# Altium PCB pneu-master.PcbDoc
Units mil, origin at the board's own origin, x right, y up, seen from the top; angles counter-clockwise.
Board outline 2400 x 2000 mil, 2 copper layers (Top, Bottom); 67 components, 57 nets, 233 pads, 159 vias.
Unrouted connection lines stored in the file: 18.
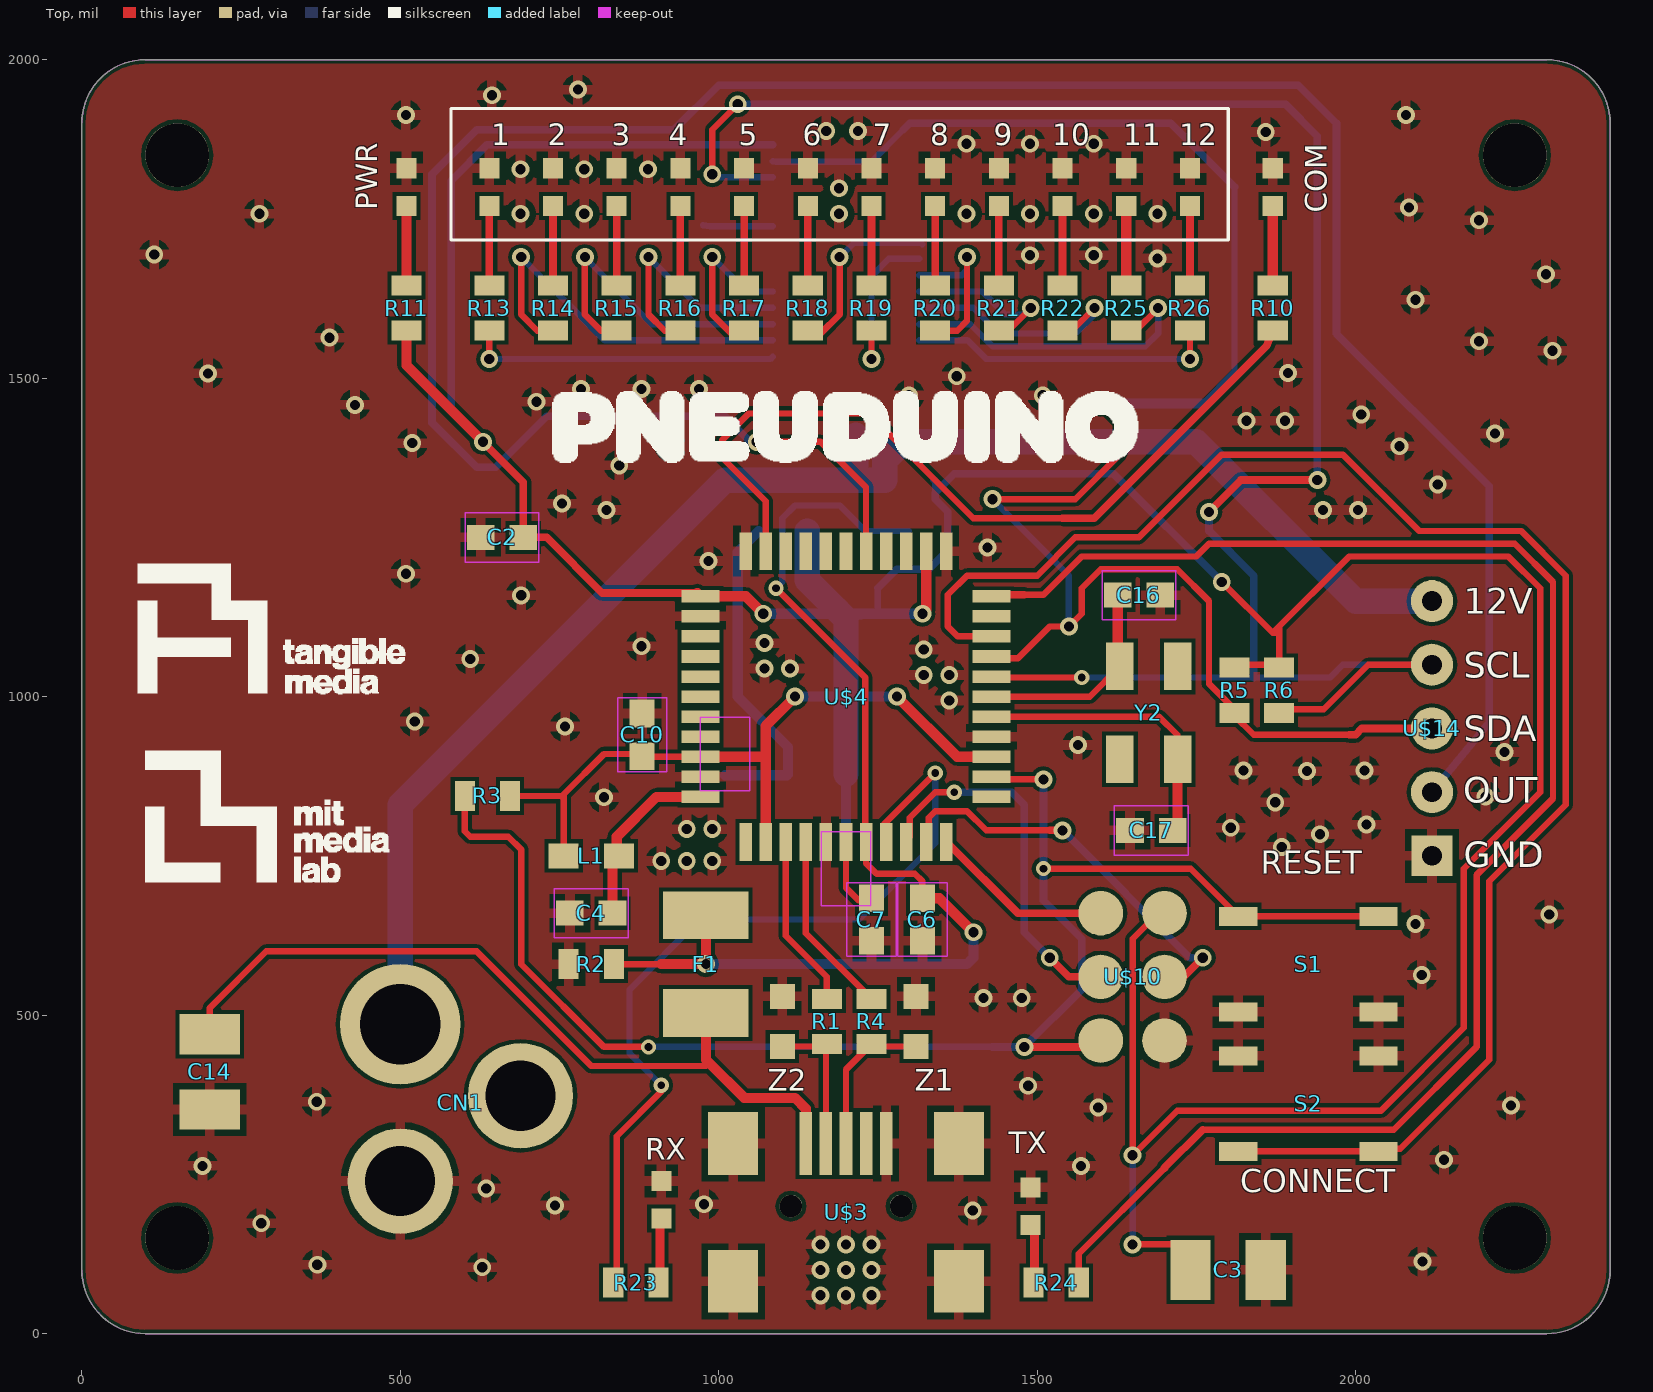
[diagram p0: Top view]
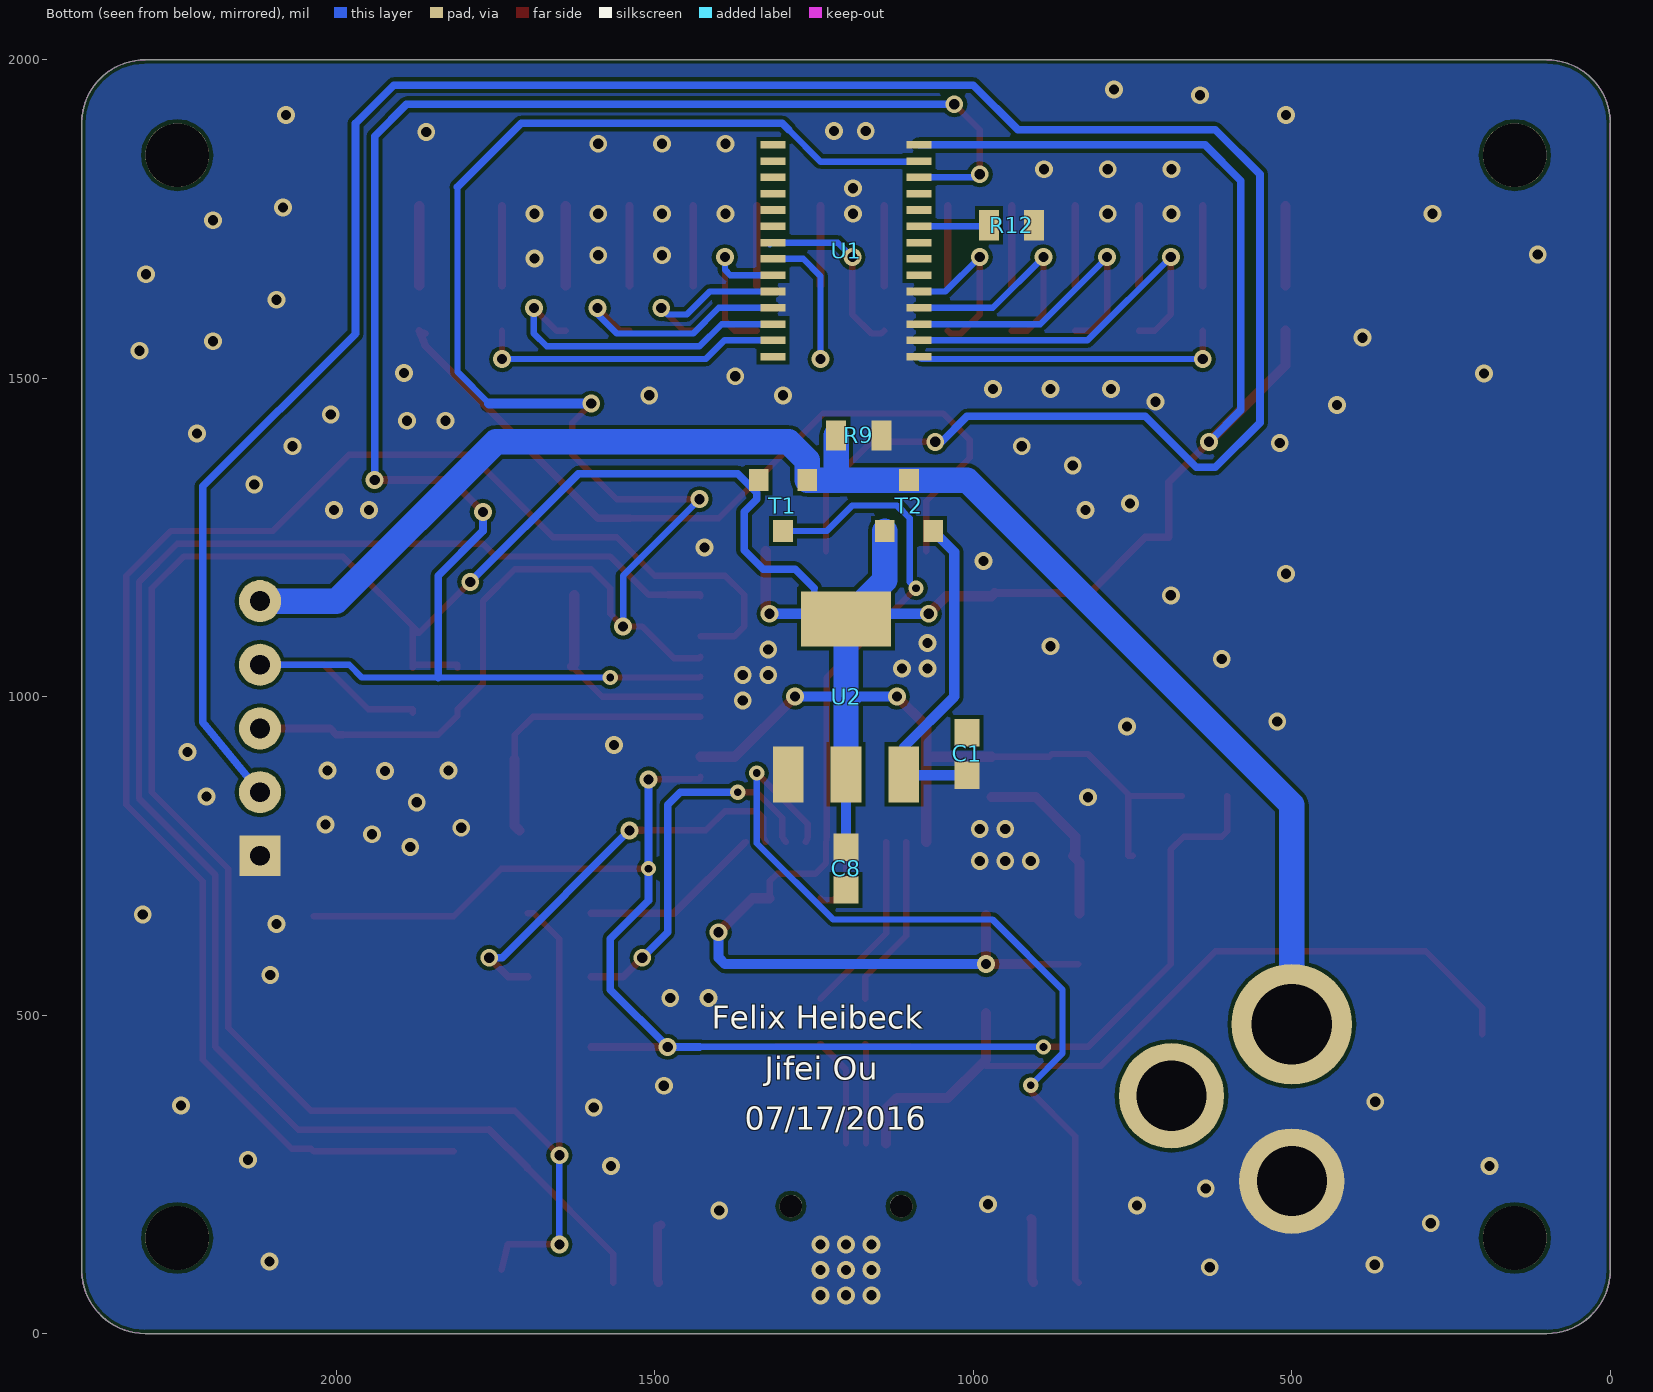
[diagram p1: Bottom view, seen from below]

## Layer stack, top to bottom
Top Solder: solder mask 0.4, Solder Resist, Dk 3.5
Top: signal copper 1.378
Dielectric 1: dielectric 12.6, FR-4, Dk 4.8
Bottom: signal copper 1.378
Bottom Solder: solder mask 0.4, Solder Resist, Dk 3.5

## Board outline
100,0 2300,0 ccw(c2300,100) 2400,100 2400,1900 ccw(c2300,1900) 2300,2000 100,2000 ccw(c100,1900) 0,1900 0,100 ccw(c100,100)

## Design rules (kind name [scope] priority, off if disabled: settings)
Clearance "Clearance (Same Net)" [All] p1: gap=6 ignorepadtopadclearanceinfootprint=FALSE except(0: SMDPad-SMDPad SMDPad-THPad SMDPad-Via)
Clearance [All] p2: gap=6 ignorepadtopadclearanceinfootprint=FALSE
HoleSize HoleSize_For_NetClass_vcc [InNetClass('vcc')] p1: absolutevalues=TRUE maxlimit=0 minlimit=0 maxpercent=80.000 minpercent=20.000
HoleSize [All] p2: absolutevalues=TRUE maxlimit=100000 minlimit=12 maxpercent=80.000 minpercent=20.000
HoleToHoleClearance mdDrill [All] p1: gap=10 allowstackedmicrovias=TRUE
PasteMaskExpansion mlMinCreamFrame [All] p1: expansion=0
PolygonConnect PolygonConnect_For_PolygonThermal_ON_Width160000_Gap100000 [InPolygonClass('PolygonThermal_ON_Width160000_Gap100000')] p1: connectstyle=Relief reliefconductorwidth=16 reliefentries=4 polygonreliefangle="90 Angle" airgapwidth=10
PolygonConnect PolygonConnect_For_PolygonThermal_OFF [InPolygonClass('PolygonThermal_OFF')] p2: connectstyle=Direct reliefconductorwidth=10 reliefentries=4 polygonreliefangle="90 Angle" airgapwidth=10
PolygonConnect ThermalVias [IsVia] p3: connectstyle=Direct reliefconductorwidth=10 reliefentries=4 polygonreliefangle="90 Angle" airgapwidth=10
PolygonConnect [All] p4: connectstyle=Relief reliefconductorwidth=10 reliefentries=4 polygonreliefangle="90 Angle" airgapwidth=10
RoutingVias [All] p1: holewidth=12 width=24 viastyle="Through Hole" minholewidth=12 minwidth=24 maxholewidth=100 maxwidth=100
SolderMaskExpansion mlMinStopFrame [All] p1: expansion=2
Width Width_For_NetClass_vcc [InNetClass('vcc')] p1: maxlimit=10 minlimit=99999 preferedwidth=0 toplayer_minwidth=0 bottomlayer_minwidth=0 minimp=50.000000 maximp=50.000000 favimp=50.000000
Width [All] p2: maxlimit=10000 minlimit=6 preferedwidth=6
27 further rules are at their usual default settings.

## Classes and differential pairs
polygon class PolygonThermal_ON_Width160000_Gap100000: Polygon_2_Net_GND
polygon class PolygonThermal_OFF: Polygon_1_Net_GND

## Components (designator, comment, footprint, x,y, rotation, side; value= is the part's Value field where it differs from the comment)
1 "" CHIPLED_0603 440,1800 r0 top
2 "" CHIPLED_0603 540,1800 r0 top
3 "" CHIPLED_0603 640,1800 r0 top
4 "" CHIPLED_0603 740,1800 r0 top
5 "" CHIPLED_0603 840,1800 r0 top
6 "" CHIPLED_0603 940,1800 r0 top
7 "" CHIPLED_0603 1040,1800 r0 top
8 "" CHIPLED_0603 1140,1800 r0 top
9 "" CHIPLED_0603 1240,1800 r0 top
10 "" CHIPLED_0603 1340,1800 r0 top
11 "" CHIPLED_0603 1440,1800 r0 top
12 "" CHIPLED_0603 1540,1800 r0 top
C1 "0.1uF" 0603-CAP#1 810,910 r270 bottom
C2 "0.1uF" 0603-CAP#2 460,1250 r180 top
C3 "22uF" SMC_B#1 1600,100 r0 top
C4 "1uF" 0603-CAP#3 600,660 r0 top
C6 "0.1uF" 0603-CAP#4 1120,650 r270 top
C7 "1uF" 0603-CAP#4 1040,650 r270 top
C8 "0.1uF" 0603-CAP#5 1000,730 r90 bottom
C10 "0.1uF" 0603-CAP#6 680,940 r90 top
C14 "22uF" SMC_B#2 1.15,410.77 r270 top
C16 "" 0603-CAP#3 1460,1159.29 r0 top
C17 "" 0603-CAP#2 1479.29,790 r180 top
CN1 "" DCJACK_2MM_PTH 300,-50 r0 top
COM "" CHIPLED_0603 1670,1800 r0 top
F1 "" L1812 780,580 r90 top
L1 "" 0805#1 600,750 r0 top
PWR "" CHIPLED_0603 310,1800 r0 top
R1 "" 0805#2 970,490 r90 top
R2 "10K" 0805#3 600,580 r0 top
R3 "10K" 0805#4 437,844 r180 top
R4 "22" 0805#2 1040,490 r90 top
R5 "" 0805#5 1610,1010 r270 top
R6 "" 0805#2 1680,1010 r90 top
R9 "10K" 0805#3 980,1410 r0 bottom
R10 "" 0805#5 1670,1610 r270 top
R11 "1k" 0805#5 310,1610 r270 top
R12 "10K" 0805#4 740,1740 r180 bottom
R13 "" 0805#5 440,1610 r270 top
R14 "" 0805#5 540,1610 r270 top
R15 "" 0805#5 640,1610 r270 top
R16 "" 0805#5 740,1610 r270 top
R17 "" 0805#5 840,1610 r270 top
R18 "" 0805#5 940,1610 r270 top
R19 "" 0805#5 1040,1610 r270 top
R20 "" 0805#5 1140,1610 r270 top
R21 "" 0805#5 1240,1610 r270 top
R22 "" 0805#5 1340,1610 r270 top
R23 "1k" 0805#4 670,80 r180 top
R24 "1k" 0805#3 1330,80 r0 top
R25 "" 0805#5 1440,1610 r270 top
R26 "" 0805#5 1540,1610 r270 top
RX "" CHIPLED_0603 710,210 r0 top
S1 "" TACTILE-SWITCH-SMD 1726,580 r180 top
S2 "" TACTILE-SWITCH-SMD 1726,361 r180 top
T1 "" SOT-23#1 1100,1300 r180 bottom
T2 "" SOT-23#2 900,1300 r0 bottom
TX "" CHIPLED_0603 1290,200 r0 top
U1 "" TSSOP28 1000,1700 r90 bottom
U2 "" LINEAR_SOT223 1000,1000 r180 bottom
U$3 "" USB-MINIB 1000,200 r90 top
U$4 "" TQFP44 1000,1000 r90 top
U$10 "" POGO_ISP 1450,560 r0 top
U$14 "" 1X05_TIGHT 1920,950 r90 top
Y2 "16MHz" CRYSTAL-SMD-5X3 1475.36,974.64 r90 top
Z1 "" CT/CN0603 1110,490 r90 top
Z2 "" CT/CN0603 900,490 r90 top

## Footprints (in the part's own frame and the unit in brackets; to place one, negate y for a bottom-side part, rotate by r counter-clockwise, add the part's x,y. Pads: shape width x height; smd on the part's side, far side on the other; paste and mask are expansions set on the pad)
1X05_TIGHT [mil] "1X05_TIGHT"
  round 66 / inner round 60 / far side round 66 hole 31: P$1(200,-200) P$2(0,-200) P$3(100,-200) P$4(-100,-200)
  rect 63.9x63.9 / inner rect 60x60 / far side rect 63.9x63.9 hole 31: P$5(-200,-200)
0603-CAP#1 [mm] "0603-CAP"
  rect 1.1x1 smd: 1(-0.85,-5.08) 2(0.85,-5.08)
  Bottom keep-out lines w0.051: 1.473,-4.097 1.473,-6.063 -1.473,-6.063 -1.473,-4.097 1.473,-4.097
0603-CAP#2 [mm] "0603-CAP"
  rect 1.1x1 smd: 1(-5.93,0) 2(-4.23,0)
  Top keep-out lines w0.051: -3.607,0.983 -3.607,-0.983 -6.553,-0.983 -6.553,0.983 -3.607,0.983
0603-CAP#3 [mm] "0603-CAP"
  rect 1.1x1 smd: 1(4.23,0) 2(5.93,0)
  Top keep-out lines w0.051: 3.607,-0.983 3.607,0.983 6.553,0.983 6.553,-0.983 3.607,-0.983
0603-CAP#4 [mm] "0603-CAP"
  rect 1.1x1 smd: 1(-0.85,5.08) 2(0.85,5.08)
  Top keep-out lines w0.051: 1.473,4.097 -1.473,4.097 -1.473,6.063 1.473,6.063 1.473,4.097
0603-CAP#5 [mm] "0603-CAP"
  rect 1.1x1 smd: 1(-0.85,5.08) 2(0.85,5.08)
  Bottom keep-out lines w0.051: -1.473,4.097 -1.473,6.063 1.473,6.063 1.473,4.097 -1.473,4.097
0603-CAP#6 [mm] "0603-CAP"
  rect 1.1x1 smd: 1(-0.85,-5.08) 2(0.85,-5.08)
  Top keep-out lines w0.051: -1.473,-4.097 -1.473,-6.063 1.473,-6.063 1.473,-4.097 -1.473,-4.097
0805#1 [mm] "0805"
  rect 1.2x1 smd: 1(3.98,0) 2(6.18,0)
0805#2 [mm] "0805"
  rect 0.8x1.2 smd: 1(-0.9,-5.08) 2(0.9,-5.08)
0805#3 [mm] "0805"
  rect 0.8x1.2 smd: 1(4.18,0) 2(5.98,0)
0805#4 [mm] "0805"
  rect 0.8x1.2 smd: 1(-5.98,0) 2(-4.18,0)
0805#5 [mm] "0805"
  rect 0.8x1.2 smd: 1(-0.9,5.08) 2(0.9,5.08)
CHIPLED_0603 [mil] "CHIPLED_0603"
  rect 31.5x31.5 smd: A(200,-29.53) C(200,29.53)
CRYSTAL-SMD-5X3 [mil] "CRYSTAL-SMD-5X3"
  rect 74.8x43.31 smd: 1(-72.83,-245.28) 2(72.83,-245.28) 3(72.83,-154.72) 4(-72.83,-154.72)
CT/CN0603 [mm] "CT/CN0603"
  rect 1x1 smd: 1(-1,-5.08) 2(1,-5.08)
DCJACK_2MM_PTH [mm] "DCJACK_2MM_PTH"
  round 4.2 / inner round 1.524 / far side round 4.2 hole 2.8: GND(5.08,7.35) GNDBREAK(9.88,10.75)
  round 4.8 / inner round 1.524 / far side round 4.8 hole 3.2: PWR(5.08,13.6)
L1812 [mil] "L1812"
  rect 74.8x133.86 smd: 1(-76.77,-200) 2(76.77,-200)
LINEAR_SOT223 [mil] "LINEAR_SOT223"
  rect 48x88 smd: 1(-291,-122) 2(-200,-122) 3(-109,-122)
  rect 141.73x86.61 smd: 4(-200,122.01)
POGO_ISP [mil] "POGO_ISP"
  rrect100% 70x70 smd: 1(150,100) 2(250,100) 3(150,0) 4(250,0) 5(150,-100) 6(250,-100)
SMC_B#1 [mil] "SMC_B"
  rect 62.99x94.49 smd: +(140.94,0) -(259.06,0)
SMC_B#2 [mil] "SMC_B"
  rect 62.99x94.49 smd: +(-59.06,200) -(59.06,200)
SOT-23#1 [mil] "SOT-23"
  rect 31x35 smd: 1(-199,-40) 2(-237,40) 3(-161,40)
SOT-23#2 [mil] "SOT-23"
  rect 31x35 smd: 1(201,-40) 2(163,40) 3(239,40)
TACTILE-SWITCH-SMD [mil] "TACTILE-SWITCH-SMD"
  rect 60x30 smd: 1(-310,75) 2(-90,75) 3(-310,-75) 4(-90,-75)
TQFP44 [mil] "TQFP44"
  rect 59.06x19.69 smd: 1(-228.35,-42.52) 2(-228.35,-74.02) 3(-228.35,-105.51) 4(-228.35,-137.01) 5(-228.35,-168.5) 6(-228.35,-200) 7(-228.35,-231.5) 8(-228.35,-262.99) 9(-228.35,-294.49) 10(-228.35,-325.98) 11(-228.35,-357.48) 23(228.35,-357.48) 24(228.35,-325.98) 25(228.35,-294.49) 26(228.35,-262.99) 27(228.35,-231.5) 28(228.35,-200) 29(228.35,-168.5) 30(228.35,-137.01) 31(228.35,-105.51) 32(228.35,-74.02) 33(228.35,-42.52)
  rect 19.69x59.06 smd: 12(-157.48,-428.35) 13(-125.98,-428.35) 14(-94.49,-428.35) 15(-62.99,-428.35) 16(-31.5,-428.35) 17(0,-428.35) 18(31.5,-428.35) 19(62.99,-428.35) 20(94.49,-428.35) 21(125.98,-428.35) 22(157.48,-428.35) 34(157.48,28.35) 35(125.98,28.35) 36(94.49,28.35) 37(62.99,28.35) 38(31.5,28.35) 39(0,28.35) 40(-31.5,28.35) 41(-62.99,28.35) 42(-94.49,28.35) 43(-125.98,28.35) 44(-157.48,28.35)
TSSOP28 [mil] "TSSOP28"
  rect 12x39 smd: 1(-166.34,85.13) 2(-140.75,85.13) 3(-115.16,85.13) 4(-89.57,85.13) 5(-63.98,85.13) 6(-38.39,85.13) 7(-12.8,85.13) 8(12.8,85.13) 9(38.39,85.13) 10(63.98,85.13) 11(89.57,85.13) 12(115.16,85.13) 13(140.75,85.13) 14(166.34,85.13) 15(166.34,314.87) 16(140.75,314.87) 17(115.16,314.87) 18(89.57,314.87) 19(63.98,314.87) 20(38.39,314.87) 21(12.8,314.87) 22(-12.8,314.87) 23(-38.39,314.87) 24(-63.98,314.87) 25(-89.57,314.87) 26(-115.16,314.87) 27(-140.75,314.87) 28(-166.34,314.87)
USB-MINIB [mm] "USB-MINIB"
  rect 2.5x0.5 smd: D+(2.5,-5.08) D-(2.5,-4.28) GND(2.5,-6.68) ID(2.5,-5.88) VBUS(2.5,-3.48)
  round 0.9 hole 0.9 unplated: MH1(0,-2.88) MH2(0,-7.28)
  rect 2.5x2 smd: MTN1(-3,-0.58) MTN2(2.5,-0.58) MTN3(-3,-9.58) MTN4(2.5,-9.58)

## Part data
1 2 3 4 5 6 7 8 9 10 11 12 COM PWR RX TX: library part CHIPLED_0603, PackageName=CHIPLED_0603
C1 C2 C4 C6 C7 C8 C10 C16 C17: library part 0603-CAP, PackageName=0603-CAP
C3 C14: library part SMC_B, PackageName=SMC_B
CN1: library part DCJACK_2MM_PTH, PackageName=DCJACK_2MM_PTH
F1: library part L1812, PackageName=L1812
L1 R1 R2 R3 R4 R5 R6 R9 R10 R11 R12 R13 R14 R15 R16 R17 R18 R19 R20 R21 R22 R23 R24 R25 R26: library part 0805, PackageName=0805
S1 S2: library part TACTILE-SWITCH-SMD, PackageName=TACTILE-SWITCH-SMD
T1 T2: library part SOT-23, PackageName=SOT-23
U1: library part TSSOP28, PackageName=TSSOP28
U2: library part LINEAR_SOT223, PackageName=LINEAR_SOT223
U$3: library part USB-MINIB, PackageName=USB-MINIB
U$4: library part TQFP44, PackageName=TQFP44
U$10: library part POGO_ISP, PackageName=POGO_ISP
U$14: library part 1X05_TIGHT, PackageName=1X05_TIGHT
Y2: library part CRYSTAL-SMD-5X3, PackageName=CRYSTAL-SMD-5X3
Z1 Z2: library part CT/CN0603, PackageName=CT/CN0603

## Free pads (board coordinates)
  round 100 hole 100 unplated: MH1(150,1850) MH2(2250,1850) MH3(2250,150) MH4(150,150)

## Via types
v1: diameter 28/28 (per signal layer), hole 16, Top to Bottom, tented both sides, 152 vias
v2: diameter 24/24 (per signal layer), hole 12, Top to Bottom, tented both sides, 7 vias

## Nets (pads, with @x,y where several pads share a name; then routed paths per layer and width w, separated by ;. In a path a pad name is that pad's centre, name@x,y a point inside that pad or via, vN(x,y) a via of type N, cw(c..) or ccw(c..) an arc to the next point about the centre after c; other vN are vias at no path point)
+5V: C2.1 C3.+ C8.1 C10.1 L1.1 R3.1 R5.1 R6.2 R11.2 T1.2 T2.3 U1.28 U2.2 U2.4 U$4.2 U$4.14 U$4.24 U$4.34 U$4.42 U$10.2 | length 7433.8
  Top w10: R3.1 752.69,844 756.69,840 ; L1.1@750,750 L1.1 756.69,840 ; U$4.42 881.02,905.51 C10.1 876.54,910 820,910 756.69,846.69 756.69,840 ; v1(1650,140) 1730.94,140 C3.+ ; U$10.2 1690,660 1650,620 v1(1650,280) 1720,350 2040,350 2170,480 2170,730 2290,850 2290,1170 2240,1220 1990,1220 1870,1100 ; v1(1790,1180) 1870,1100 ; R5.1 1810,1050 R6.2@1880,1050 ; R6.2 R6.2@1880,1050 ; 1880,1110 1880,1100 ; 1870,1100 1880,1100 ; R6.2@1880,1050 1880,1100
  Top w12: v1(630,1400) 693.46,1336.54 C2.1 730,1250 817.4,1162.6 U$4.34@966.54,1162.6
  Top w16: R11.2 510,1520 v1(630,1400) ; U$4.34@966.54,1162.6 U$4.34 1042.52,1157.48 v1(1070,1130) ; U$4.42 1069.53,905.51 1074.02,910 ; U$4.2 1074.02,910 ; v1(1120,1000) 1074.02,954.02 1074.02,910 ; v1(1280,1000) 1374.49,905.51 U$4.14 ; v1(1320,1130) 1325.98,1135.98 U$4.24
  Bottom w10: U2.4 1250,1130 1250,1170 ; T1.2 1340,1340 1340,1320 ; v1(1650,140) v1(1650,280)
  Bottom w12: v1(630,1400) 580,1450 580,1810 636.34,1866.34 1085.13,1866.34 ; 1250,1170 1280,1200 1330,1200 1360,1230 1360,1290 1340,1310 1340,1320 1370,1350 1620,1350 v1(1790,1180)
  Bottom w16: v1(1070,1130) 1180,1130 U2.4@1186,1136 ; v1(1120,1000) 1180,1000 1200,980 ; 1200,763.46 U2.2 ; 1200,1000 v1(1280,1000) ; U2.4 1207.99,1130 1250,1130 v1(1320,1130)
  Bottom w40: T2.3 1139,1183.01 1186,1136 U2.4 1200,1000 1200,980 U2.2
+VIN: C1.1 T2.2 U2.3 | length 528
  Bottom w16: 1010,876.54 1107.54,876.54 U2.3 1109,921 1030,1000 1030,1227 T2.2
BTN: S2.1 S2.2 U$4.20 | length 2528
  Top w10: U$4.20 1375.51,1094.49 1360,1110 1360,1160 1390,1190 1500,1190 1560,1250 1660,1250 1790,1380 1980,1380 2100,1260 2260,1260 2330,1190 2330,830 2210,710 2210,430 2070,290 2040,290 S2.1 S2.2
D5: U$4.31
D13: R10.2 U$4.32 | length 1292
  Top w10: U$4.32 1074.02,1306.56 1005.56,1375.01 1005.56,1402.79 1047.23,1444.46 1235.54,1444.46 1400,1280 1540,1280 ; R10.2@1860,1570 R10.2
  Top w12: 1540,1280 1590,1280 1860,1550 R10.2
D+: R4.1 U$3.D+ Z1.1 | length 244.3
  Top w10: U$3.D+ 1200,414.57 R4.1 1243.94,450.63 Z1.1
D-: R1.1 U$3.D- Z2.1 | length 228.4
  Top w10: Z2.1 1166.06,450.63 R1.1 1168.5,453.07 U$3.D-
DATA_OUT: U$4.27 U$14.P$4 | length 3964.3
  Top w10: v1(1060,1400) 1160,1400 1231.5,1328.5 U$4.27
  Bottom w12: v1(1060,1400) 1050,1400 1010,1440 730,1440 650,1360 620,1360 550,1430 550,1820 620,1890 930,1890 1000,1960 1910,1960 1970,1900 1970,1570 2210,1330 2210,960 U$14.P$4
GND: 1.C 2.C 3.C 4.C 5.C 6.C 7.C 8.C 9.C 10.C 11.C 12.C C1.2 C2.2 C3.- C4.1 C6.2 C7.2 C8.2 C10.2 C14.- C16.2 C17.2 CN1.GND COM.C PWR.C R2.1 R9.1 R12.2 RX.C S1.1 S1.2 S2.3 S2.4 TX.C U1.1 U1.2 U1.3 U1.4 U1.5 U1.14 U1.24 U1.25 U2.1 U$3.GND U$3.MTN1 U$3.MTN2 U$3.MTN3 U$3.MTN4 U$4.5 U$4.15 U$4.23 U$4.33 U$4.35 U$4.43 U$10.6 U$14.P$5 Z1.2 Z2.2
  other v1: 1160,60 1200,60 1240,60 1160,100 1200,100 1240,100 629,104 370,108 2105,113 1160,140 1200,140 1240,140 281.87,173.24 1399,193 743,201 977,203 635.18,227.69 189.67,263.23 1569,263 2139,273 1596,355 2244,358 369,364 1486,389 1416,527 1476,527 2104,563 2094,643 2304,658 910,742 950,742 990,742 1884,764 1944,784 950,792 990,792 1804,794 2017.33,799.01 1874,834 820,842 2204,843 1924,883 1824,884 2014,884.01 2234,913 1564,924 759,953 523,961 1362,994 1322,1034 1362,1034 1072,1044 1112,1044 610,1059 1322,1074 879,1079 1072,1084 690,1159 509,1193 984,1213 1422,1234 824,1293 1949,1293 2004,1293 754,1303 2129,1333 844,1363 924,1393 2069,1393 519,1398 2219,1413 1829,1433 1889,1433 2009,1443 429,1458 714,1463 1299,1473 1509,1473 784,1483 879,1483 969,1483 1374,1503 198.47,1507.46 1894,1508 2309,1543 2194,1558 389,1563.56 2094,1623 2299,1663 1689,1688 1489,1693 1589,1693 114,1694 2194,1748 279,1758 689,1758 789,1758 1189,1758 1389,1758 1489,1758 1589,1758 1689,1758 2084,1768 1189,1798 689,1828 789,1828 889,1828 1389,1868 1489,1868 1589,1868 1859,1886.33 1169,1888 1219,1888 509,1913 2079,1913 643.99,1944.1 779,1953
GNDBREAK: CN1.GNDBREAK
LED1: R13.2 U1.15 | length 491.2
  Top w10: v1(640,1530) R13.2
  Bottom w10: v1(640,1530) 1081.46,1530 1085.13,1533.66
LED2: R14.2 U1.16 | length 599.8
  Top w10: v1(690,1690) 690,1600 715.43,1574.57 R14.2
  Bottom w10: v1(690,1690) 820.75,1559.25 1085.13,1559.25
LED3: R15.2 U1.17 | length 489.2
  Top w10: v1(790,1690) 790,1600 815.43,1574.57 R15.2
  Bottom w10: v1(790,1690) 895.16,1584.84 1085.13,1584.84
LED4: R16.2 U1.18 | length 378.6
  Top w10: v1(890,1690) 890,1600 915.43,1574.57 R16.2
  Bottom w10: v1(890,1690) 969.57,1610.43 1085.13,1610.43
LED5: R17.2 U1.19 | length 271.8
  Top w10: v1(990,1690) 990,1600 1020,1570 1035.43,1570 R17.2
  Bottom w10: v1(990,1690) 1043.98,1636.02 1085.13,1636.02
LED6: R18.2 U1.7 | length 294.5
  Top w10: R18.2 1144.57,1570 1160,1570 1190,1600 v1(1190,1690)
  Bottom w10: v1(1190,1690) 1212.8,1712.8 1314.87,1712.8 1320,1710
LED7: R19.2 U1.8 | length 260.7
  Top w10: v1(1240,1530) R19.2
  Bottom w10: v1(1240,1530) 1240,1660 1267.2,1687.2 1314.87,1687.2
LED8: R20.2 U1.9 | length 265
  Top w10: R20.2 1374.57,1574.57 1390,1590 v1(1390,1690)
  Bottom w10: 1314.87,1661.61 1381.61,1661.61 1390,1670 v1(1390,1690) v1@1390,1680
LED9: R21.2 U1.10 | length 258.9
  Top w10: R21.2 1454.57,1574.57 v1(1490,1610)
  Bottom w10: 1314.87,1636.02 1413.98,1636.02 1450,1600 1480,1600 v1(1490,1610)
LED10: R22.2 U1.11 | length 379
  Top w10: R22.2 1554.57,1574.57 v1(1590,1610)
  Bottom w10: 1314.87,1610.43 1399.57,1610.43 1440,1570 1560,1570 1590,1600 v1(1590,1610)
LED11: R25.2 U1.12 | length 502.5
  Top w10: R25.2 1654.57,1574.57 v1(1690,1610)
  Bottom w10: 1314.87,1584.84 1395.16,1584.84 1430,1550 1670,1550 1690,1570 v1(1690,1610)
LED12: R26.2 U1.13 | length 481.8
  Top w10: v1(1740,1530) R26.2
  Bottom w10: 1314.87,1559.25 1390.75,1559.25 1420,1530 v1(1740,1530)
MISO: U$4.11 U$10.1 | length 288.6
  Top w10: U$4.11 U$4.11@1360,770
  Top w12: U$4.11@1360,770 1470,660 U$10.1
MOSI: U$4.10 U$10.4 | length 641.1
  Top w10: U$4.10 1330,780 1330,810 1340,820 1390,820 1420,790 1520,790
  Top w12: 1520,790 v1(1540,790) ; U$10.4 1730,560 v1(1760,590)
  Bottom w12: v1(1540,790) 1740,590 v1(1760,590)
N$1: C16.1 U$4.17 Y2.3 | length 334.7
  Top w10: U$4.17 1582.6,1000 Y2.3
  Top w16: C16.1 1626.54,1051.02 Y2.3
N$2: U$4.21
N$3: C17.1 U$4.16 Y2.1 | length 457
  Top w10: U$4.16 1691.5,968.5 1720,940 1720,902.44 Y2.1
  Top w16: C17.1 1720.63,797.88 Y2.1
N$5: C7.1 U$4.6 | length 121.4
  Top w10: U$4.6 1200,700 1220,680 1236.54,680 C7.1
N$6: C4.2 L1.2 U$4.44 | length 283
  Top w16: C4.2 833.46,740.16 L1.2 840,753.31 840,780 902.52,842.52 U$4.44
N$7: R23.1 RX.A | length 102.8
  Top w14: R23.1 908,84 908,180 RX.A
N$8: R24.1 TX.A | length 94.7
  Top w14: TX.A 1496,168 1496,84 R24.1
N$9: COM.A R10.1 | length 125
  Top w16: R10.1 COM.A
N$10: PWR.A R11.1 | length 125
  Top w16: R11.1 PWR.A
N$12: R12.1 U1.23 | length 109.8
  Bottom w10: R12.1 987.05,1738.39 1085.13,1738.39
N$14: 1.A R13.1 | length 125
  Top w12: R13.1 1.A
N$15: 2.A R14.1 | length 125
  Top w12: R14.1 2.A
N$16: 3.A R15.1 | length 125
  Top w12: R15.1 3.A
N$17: 4.A R16.1 | length 125
  Top w12: R16.1 4.A
N$18: 5.A R17.1 | length 125
  Top w12: R17.1 5.A
N$19: 6.A R18.1 | length 125
  Top w12: R18.1 6.A
N$20: 7.A R19.1 | length 125
  Top w12: R19.1 7.A
N$21: 8.A R20.1 | length 125
  Top w12: R20.1 8.A
N$22: 9.A R21.1 | length 125
  Top w12: R21.1 9.A
N$23: 10.A R22.1 | length 125
  Top w12: R22.1 10.A
N$24: 11.A R25.1 | length 125
  Top w16: R25.1 11.A
N$25: 12.A R26.1 | length 125
  Top w12: R26.1 12.A
RD+: R4.2 U$4.4 | length 288.9
  Top w10: U$4.4 1137.01,628.43 R4.2
RD-: R1.2 U$4.3 | length 272.9
  Top w10: U$4.3 1105.51,624.49 1170,560 R1.2
RESET: R3.2 S1.3 S1.4 U$4.13 U$10.5 | length 2423.2
  Top w10: R3.2 601.57,788.43 610,780 670,780 690,760 690,580 820,450 v2(890,450) ; U$4.13 1430,870 v1@1500,870 ; v2(1510,730) 1741,730 S1.4 S1.3
  Top w12: v1(1480,450) U$10.5@1600,450 ; v1@1500,870 v1(1510,870)
  Bottom w10: v2(890,450) 1430,450
  Bottom w12: 1430,450 v1(1480,450) 1570,540 1570,620 1510,680 v2(1510,730) v1(1510,870)
RXLED: R23.2 U$4.8 | length 1339.2
  Top w10: R23.2 840,85.43 840,310 910,380 v2(910,390) ; U$4.8 1260,780 1260,800 v2(1340,880)
  Bottom w10: v2(910,390) 860,440 860,540 970,650 1220,650 1340,770 v2(1340,880)
SCK: U$4.9 U$10.3 | length 593.9
  Top w10: U$4.9 1300,780 1300,810 1340,850 v2(1370,850)
  Top w12: v1(1520,590) 1550,560 U$10.3
  Bottom w12: v2(1370,850) 1460,850 1480,830 1480,630 v1(1520,590)
SCL: R6.1 U1.26 U$4.18 U$14.P$3 | length 3149.1
  Top w10: v1(990,1820) 990,1890 v1(1030,1930) ; U$4.18 1430,1030 v2(1570,1030) ; R6.1 1880,980 1950,980 2020,1050 U$14.P$3
  Top w12: v1(1770,1290) 1820,1340 v1(1940,1340)
  Bottom w10: v1(990,1820) 994.84,1815.16 1085.13,1815.16 ; v2(1570,1030) 1840,1030 1960,1030 1980,1050 U$14.P$3
  Bottom w12: v1(1030,1930) 1890,1930 1940,1880 v1(1940,1340) ; v1(1770,1290) 1770,1260 1840,1190 1840,1030
SDA: R5.2 U1.27 U$4.19 U$14.P$2 | length 2851.7
  Top w10: U$4.19 1430,1060 1470,1060 1520,1110 v1(1550,1110) 1570,1130 1570,1170 1600,1200 1720,1200 1770,1150 1770,1020 1810,980 R5.2 1810,970 1840,940 1990,940 ; v1(1430,1310) 1560,1310 1630,1380 1630,1430 v1(1600,1460)
  Top w12: 1990,940 2000,940 2010,950 U$14.P$2
  Bottom w10: 1085.13,1840.75 1090,1840 1240,1840 1290,1890 ; v1(1430,1310) 1550,1190 v1(1550,1110) ; 1760,1460 1810,1510 1810,1800
  Bottom w12: 1290,1890 1300,1900 1710,1900 1810,1800
  Bottom w16: v1(1600,1460) 1760,1460
TXLED: R24.2 U$4.22 | length 2525.1
  Top w10: U$4.22 U$4.22@1430,1160 ; 1480,1160 1510,1160 1570,1220 1750,1220 1770,1240 2250,1240 2310,1180 2310,840 2190,720 2190,450 2060,320 1760,320 ; R24.2 1565.43,125.43 1700,260
  Top w12: U$4.22@1430,1160 1480,1160 ; 1700,260 1760,320
VIN: CN1.PWR R9.2 T1.3 T2.1 U$14.P$1 | length 2394.6
  Bottom w40: CN1.PWR 500,830 1010,1340 T2.1 1210,1340 ; R9.2 1215.43,1345.43 1210,1340 ; U$14.P$1 2000,1150 1750,1400 1290,1400 1261,1371 T1.3 1210,1340
VUSB: C6.1 F1.2 R2.2 T1.1 U$4.7 | length 1742.1
  Top w10: R2.2 910,580 ; v2(1090,1170) 1230,1030 1230,780 U$4.7 1231.5,738.5 1248,722 1308,722 1320,710 C6.1
  Top w16: 910,580 v1(980,580) F1.2 ; C6.1 1346.54,683.46 v1(1400,630)
  Bottom w10: v2(1090,1170) 1100,1180 1100,1280 1120,1300 1190,1300 1230,1260 T1.1
  Bottom w16: v1(980,580) 1390,580 1400,590 v1(1400,630)
VUSBD: C14.+ F1.1 U$3.VBUS | length 1255.3
  Top w10: C14.+ 201.11,469.87 201.11,511.06 290.05,600 620,600 800,420 980,420 985,425
  Top w16: F1.1 980,430 985,425 1040,370 1120,370 1137.01,352.99 U$3.VBUS
pads on no net: U1.6 U1.20 U1.21 U1.22 U$3.ID U$3.MH1 U$3.MH2 U$4.1 U$4.12 U$4.25 U$4.26 U$4.28 U$4.29 U$4.30 U$4.36 U$4.37 U$4.38 U$4.39 U$4.40 U$4.41 Y2.2 Y2.4

## Polygon pours and split planes (outlines as drawn)
GND on Bottom "Polygon_1_Net_GND" (solid, remove dead copper, pour order 0): -78.04,2057.97 2497.96,2068.03 2508.04,-117.97 -67.96,-128.03
GND on Top "Polygon_2_Net_GND" (solid, remove dead copper, pour order 1): -138,2098.03 2458,2087.97 2458,-108.03 -138,-97.97

## Keep-outs
Keep-Out Layer:
  the board outline again, w0

## Silkscreen, mask and mechanical layers (free items; w line width, h text height)
Top Overlay:
  drawing of 2534 lines, arcs and shapes, not listed
  text "12V" at 2170,1130 h40
  text "SCL" at 2170,1030 h40
  text "SDA" at 2170,930 h40
  text "OUT" at 2168.89,833.34 h40
  text "GND" at 2170,732.23 h40
  text "RESET" at 1851.02,708.95 h62
  text "CONNECT" at 1818.7,208.95 h62
Bottom Overlay:
  text "Felix Heibeck" at 1410.46,466.25 h62
  text "Jifei Ou" at 1327.46,386.25 h62
  text "07/17/2016" at 1358.71,307.45 h62
Dimension:
  the board outline again, w0
Unrouted:
  lines w0: 1600,450 1600,460
tFinish:
  region: 1013.5,1441.5 1013.5,1442.5 1069.5,1442.5 1069.5,1441.5

## Text inside footprints (layer, text, board x,y; h text height)
CN1: Assembly Top "DC 2.0/2.1" at 370,0 h49.6
U2: Top Assembly "2" at 1250.81,829.63 h49.6; Top Assembly "1" at 1335.93,830 h49.6; Top Assembly "4" at 1125,1100 h49.6; Top Assembly "3" at 1159.81,830 h49.6
U$10: Top Assembly "ISP" at 1620,710 h49.6